# EAGLE board coaster (EAGLE 6.0)
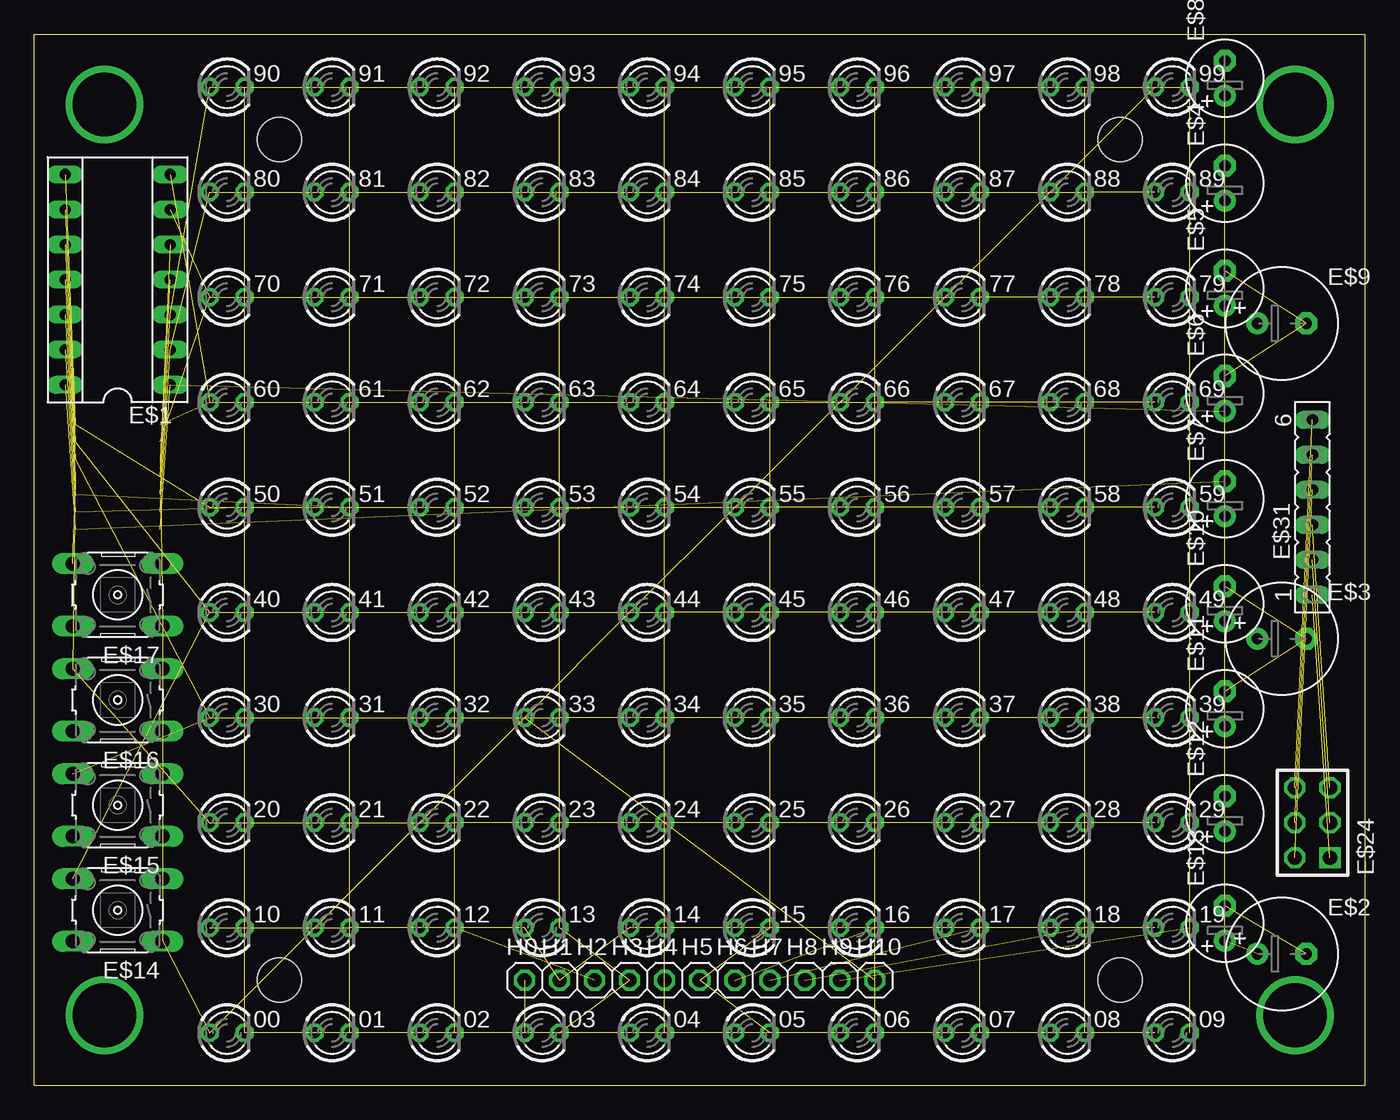
[diagram p0: board, top side]
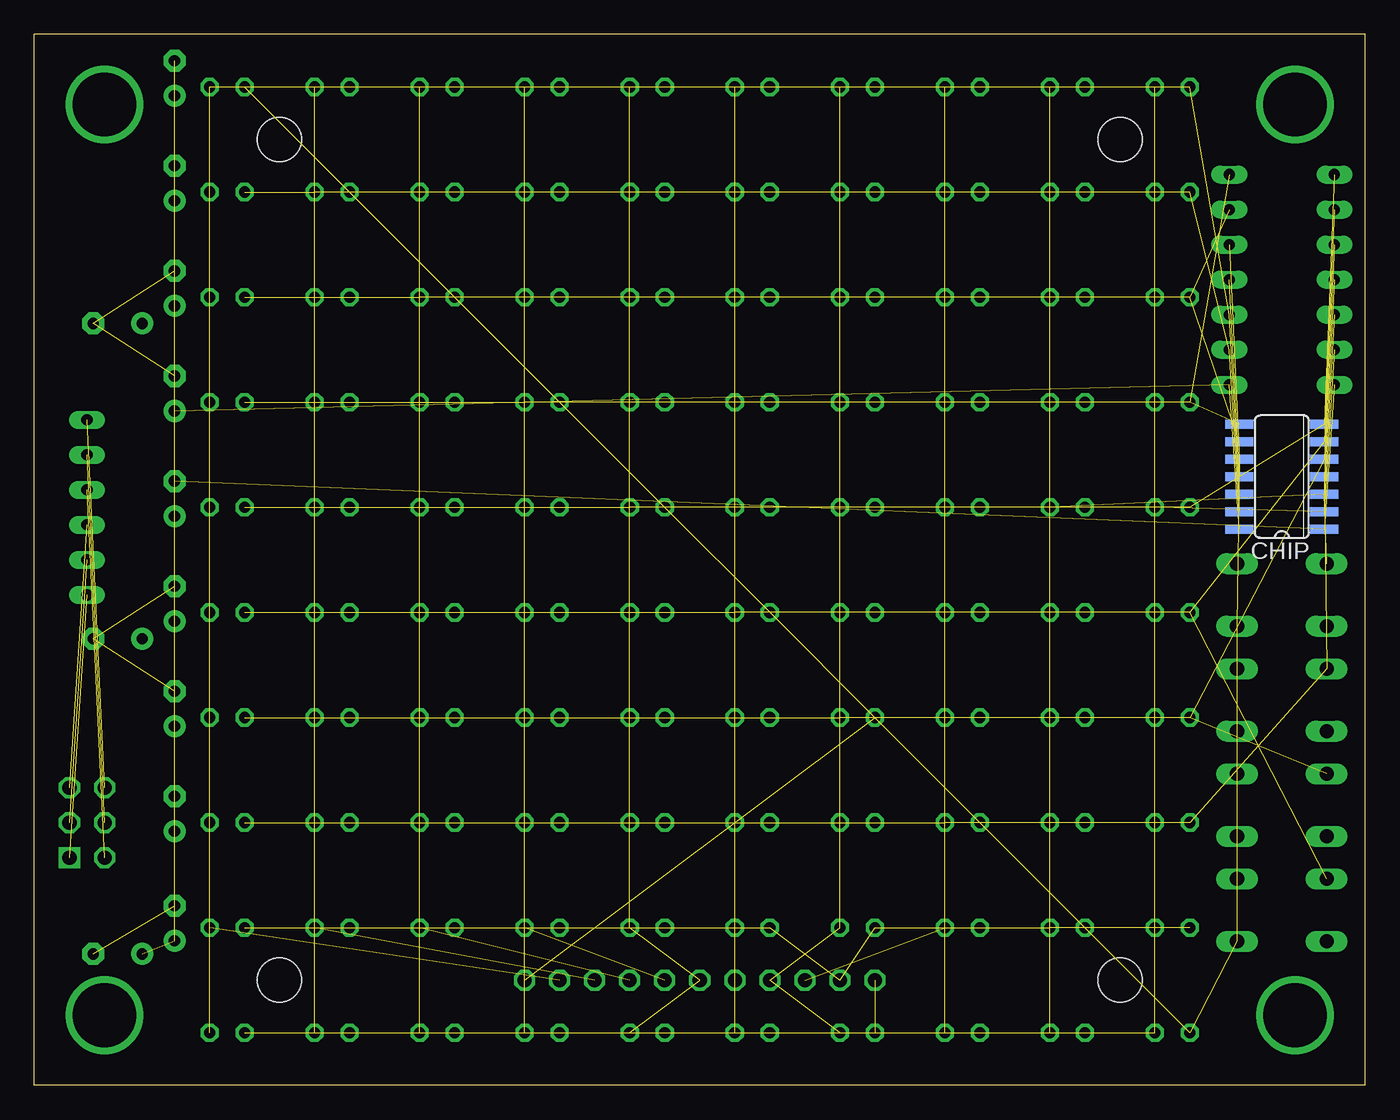
[diagram p1: board, bottom side, seen from below]

Size 96.52 x 76.2 mm. Coordinates in mm from the lower left corner, seen from the top.
Outline: 0,0 0,76.2 96.52,76.2 96.52,0 0,0
Copper layers (1*16): Top 0.035mm / dielectric 1.5mm / Bottom 0.035mm
Design rules: minimum track width 20mil, minimum drill 24mil, track to track 12mil, track to pad 12mil, pad to pad 8mil, via to via 8mil, smd to smd 8mil, copper to edge 40mil, drill to drill 8mil, minimum pad ring 10mil, minimum via ring 8mil, stop-mask expansion 4mil, vias tented up to drill 0mil, thermal gap 10mil
Holes 3.2 mm at 17.78,7.62 17.78,68.58 78.74,7.62 78.74,68.58

## Footprints (pad centres in the part's own frame; a part is rotated, then mirrored left to right if it is on the bottom)
LED3MM = drill 0.813 octagon: A -1.27,0; K 1.27,0
SO14 = smd 0.66 x 2.032: 1 -3.81,-3.073; 2 -2.54,-3.073; 3 -1.27,-3.073; 4 0,-3.073; 5 1.27,-3.073; 6 2.54,-3.073; 7 3.81,-3.073; 8 3.81,3.073; 9 2.54,3.073; 10 1.27,3.073; 11 0,3.073; 12 -1.27,3.073; 13 -2.54,3.073; 14 -3.81,3.073
SOCKET-14 = drill 0.813 long: 1 -7.62,-3.81; 2 -5.08,-3.81; 3 -2.54,-3.81; 4 0,-3.81; 5 2.54,-3.81; 6 5.08,-3.81; 7 7.62,-3.81; 8 7.62,3.81; 9 5.08,3.81; 10 2.54,3.81; 11 0,3.81; 12 -2.54,3.81; 13 -5.08,3.81; 14 -7.62,3.81
E3,5-8 = drill 0.813 pad 1.6: + -1.778,0 | drill 0.813 pad 1.6 octagon: - 1.778,0
E2,5-6 = drill 0.813 pad 1.6: + -1.27,0 | drill 0.813 pad 1.6 octagon: - 1.27,0
B3F-10XX = drill 1.016 long: 1 -3.251,2.261; 2 3.251,2.261; 3 -3.251,-2.261; 4 3.251,-2.261
AVR-ISP-6 = drill 1.016 square: 1 -2.54,-1.27 | drill 1.016 octagon: 2 -2.54,1.27; 3 0,-1.27; 4 0,1.27; 5 2.54,-1.27; 6 2.54,1.27
FE06 = drill 0.813 long: 1 -6.35,0; 2 -3.81,0; 3 -1.27,0; 4 1.27,0; 5 3.81,0; 6 6.35,0
1X01 = drill 1.016 octagon: 1 0,0

## Placement (x,y rotation side)
00  [LED3MM]  13.97,3.81 0 top
01  [LED3MM]  21.59,3.81 0 top
02  [LED3MM]  29.21,3.81 0 top
03  [LED3MM]  36.83,3.81 0 top
04  [LED3MM]  44.45,3.81 0 top
05  [LED3MM]  52.07,3.81 0 top
06  [LED3MM]  59.69,3.81 0 top
07  [LED3MM]  67.31,3.81 0 top
08  [LED3MM]  74.93,3.81 0 top
09  [LED3MM]  82.55,3.81 0 top
10  [LED3MM]  13.97,11.43 0 top
11  [LED3MM]  21.59,11.43 0 top
12  [LED3MM]  29.21,11.43 0 top
13  [LED3MM]  36.83,11.43 0 top
14  [LED3MM]  44.45,11.43 0 top
15  [LED3MM]  52.07,11.43 0 top
16  [LED3MM]  59.69,11.43 0 top
17  [LED3MM]  67.31,11.43 0 top
18  [LED3MM]  74.93,11.43 0 top
19  [LED3MM]  82.55,11.43 0 top
20  [LED3MM]  13.97,19.05 0 top
21  [LED3MM]  21.59,19.05 0 top
22  [LED3MM]  29.21,19.05 0 top
23  [LED3MM]  36.83,19.05 0 top
24  [LED3MM]  44.45,19.05 0 top
25  [LED3MM]  52.07,19.05 0 top
26  [LED3MM]  59.69,19.05 0 top
27  [LED3MM]  67.31,19.05 0 top
28  [LED3MM]  74.93,19.05 0 top
29  [LED3MM]  82.55,19.05 0 top
30  [LED3MM]  13.97,26.67 0 top
31  [LED3MM]  21.59,26.67 0 top
32  [LED3MM]  29.21,26.67 0 top
33  [LED3MM]  36.83,26.67 0 top
34  [LED3MM]  44.45,26.67 0 top
35  [LED3MM]  52.07,26.67 0 top
36  [LED3MM]  59.69,26.67 0 top
37  [LED3MM]  67.31,26.67 0 top
38  [LED3MM]  74.93,26.67 0 top
39  [LED3MM]  82.55,26.67 0 top
40  [LED3MM]  13.97,34.29 0 top
41  [LED3MM]  21.59,34.29 0 top
42  [LED3MM]  29.21,34.29 0 top
43  [LED3MM]  36.83,34.29 0 top
44  [LED3MM]  44.45,34.29 0 top
45  [LED3MM]  52.07,34.29 0 top
46  [LED3MM]  59.69,34.29 0 top
47  [LED3MM]  67.31,34.29 0 top
48  [LED3MM]  74.93,34.29 0 top
49  [LED3MM]  82.55,34.29 0 top
50  [LED3MM]  13.97,41.91 0 top
51  [LED3MM]  21.59,41.91 0 top
52  [LED3MM]  29.21,41.91 0 top
53  [LED3MM]  36.83,41.91 0 top
54  [LED3MM]  44.45,41.91 0 top
55  [LED3MM]  52.07,41.91 0 top
56  [LED3MM]  59.69,41.91 0 top
57  [LED3MM]  67.31,41.91 0 top
58  [LED3MM]  74.93,41.91 0 top
59  [LED3MM]  82.55,41.91 0 top
60  [LED3MM]  13.97,49.53 0 top
61  [LED3MM]  21.59,49.53 0 top
62  [LED3MM]  29.21,49.53 0 top
63  [LED3MM]  36.83,49.53 0 top
64  [LED3MM]  44.45,49.53 0 top
65  [LED3MM]  52.07,49.53 0 top
66  [LED3MM]  59.69,49.53 0 top
67  [LED3MM]  67.31,49.53 0 top
68  [LED3MM]  74.93,49.53 0 top
69  [LED3MM]  82.55,49.53 0 top
70  [LED3MM]  13.97,57.15 0 top
71  [LED3MM]  21.59,57.15 0 top
72  [LED3MM]  29.21,57.15 0 top
73  [LED3MM]  36.83,57.15 0 top
74  [LED3MM]  44.45,57.15 0 top
75  [LED3MM]  52.07,57.15 0 top
76  [LED3MM]  59.69,57.15 0 top
77  [LED3MM]  67.31,57.15 0 top
78  [LED3MM]  74.93,57.15 0 top
79  [LED3MM]  82.55,57.15 0 top
80  [LED3MM]  13.97,64.77 0 top
81  [LED3MM]  21.59,64.77 0 top
82  [LED3MM]  29.21,64.77 0 top
83  [LED3MM]  36.83,64.77 0 top
84  [LED3MM]  44.45,64.77 0 top
85  [LED3MM]  52.07,64.77 0 top
86  [LED3MM]  59.69,64.77 0 top
87  [LED3MM]  67.31,64.77 0 top
88  [LED3MM]  74.93,64.77 0 top
89  [LED3MM]  82.55,64.77 0 top
90  [LED3MM]  13.97,72.39 0 top
91  [LED3MM]  21.59,72.39 0 top
92  [LED3MM]  29.21,72.39 0 top
93  [LED3MM]  36.83,72.39 0 top
94  [LED3MM]  44.45,72.39 0 top
95  [LED3MM]  52.07,72.39 0 top
96  [LED3MM]  59.69,72.39 0 top
97  [LED3MM]  67.31,72.39 0 top
98  [LED3MM]  74.93,72.39 0 top
99  [LED3MM]  82.55,72.39 0 top
CHIP  [SO14]  6.03,44.13 90 bottom
E$1  [SOCKET-14]  6.03,58.42 90 top
E$2  [E3,5-8]  90.49,9.53 0 top
E$3  [E3,5-8]  90.49,32.38 0 top
E$4  [E2,5-6]  86.36,65.41 90 top
E$5  [E2,5-6]  86.36,57.78 90 top
E$6  [E2,5-6]  86.36,50.16 90 top
E$7  [E2,5-6]  86.36,42.55 90 top
E$8  [E2,5-6]  86.36,73.03 90 top
E$9  [E3,5-8]  90.49,55.24 0 top
E$10  [E2,5-6]  86.36,34.92 90 top
E$11  [E2,5-6]  86.36,27.3 90 top
E$12  [E2,5-6]  86.36,19.68 90 top
E$13  [E2,5-6]  86.36,11.75 90 top
E$14  [B3F-10XX]  6.03,12.7 180 top
E$15  [B3F-10XX]  6.03,20.32 180 top
E$16  [B3F-10XX]  6.03,27.94 180 top
E$17  [B3F-10XX]  6.03,35.56 180 top
E$24  [AVR-ISP-6]  92.71,19.05 90 top
E$31  [FE06]  92.71,41.91 90 top
H0  [1X01]  35.56,7.62 0 top
H1  [1X01]  38.1,7.62 0 top
H2  [1X01]  40.64,7.62 0 top
H3  [1X01]  43.18,7.62 0 top
H4  [1X01]  45.72,7.62 0 top
H5  [1X01]  48.26,7.62 0 top
H6  [1X01]  50.8,7.62 0 top
H7  [1X01]  53.34,7.62 0 top
H8  [1X01]  55.88,7.62 0 top
H9  [1X01]  58.42,7.62 0 top
H10  [1X01]  60.96,7.62 0 top

## Library data of the parts
00 01-09 10-99 = led
CHIP = maxim
E$1 = ic-package
E$2-E$13 = rcl
E$14-E$17 = switch-omron
E$24 = avr-5
E$31 = con-lsta
H0 H1-H10 = pinhead

## Nets
D: 00.A 11.A 22.A 33.A 44.A 55.A 66.A 77.A 88.A 99.A CHIP.10 E$1.5 E$14.1 E$15.1 E$16.1 E$17.1 H10.1
S0: 00.K 01.A 02.A 03.A 04.A 05.A 06.A 07.A 08.A 09.A 10.K 20.K 30.K 40.K 50.K 60.K 70.K 80.K 90.K CHIP.2 E$1.13 H0.1
S1: 01.K 10.A 11.K 12.A 13.A 14.A 15.A 16.A 17.A 18.A 19.A 21.K 31.K 41.K 51.K 61.K 71.K 81.K 91.K CHIP.3 E$1.12 E$17.4 H1.1
S2: 02.K 12.K 20.A 21.A 22.K 23.A 24.A 25.A 26.A 27.A 28.A 29.A 32.K 42.K 52.K 62.K 72.K 82.K 92.K CHIP.4 E$1.11 E$16.4 H2.1
S3: 03.K 13.K 23.K 30.A 31.A 32.A 33.K 34.A 35.A 36.A 37.A 38.A 39.A 43.K 53.K 63.K 73.K 83.K 93.K CHIP.5 E$1.10 E$15.4 H3.1
S4: 04.K 14.K 24.K 34.K 40.A 41.A 42.A 43.A 44.K 45.A 46.A 47.A 48.A 49.A 54.K 64.K 74.K 84.K 94.K CHIP.6 E$1.9 E$14.4 H4.1
S5: 05.K 15.K 25.K 35.K 45.K 50.A 51.A 52.A 53.A 54.A 55.K 56.A 57.A 58.A 59.A 65.K 75.K 85.K 95.K CHIP.7 E$1.8 H5.1
S6: 06.K 16.K 26.K 36.K 46.K 56.K 60.A 61.A 62.A 63.A 64.A 65.A 66.K 67.A 68.A 69.A 76.K 86.K 96.K CHIP.8 E$1.7 H6.1
S7: 07.K 17.K 27.K 37.K 47.K 57.K 67.K 70.A 71.A 72.A 73.A 74.A 75.A 76.A 77.K 78.A 79.A 87.K 97.K CHIP.9 E$1.6 H7.1
S8: 08.K 18.K 28.K 38.K 48.K 58.K 68.K 78.K 80.A 81.A 82.A 83.A 84.A 85.A 86.A 87.A 88.K 89.A 98.K CHIP.13 E$1.2 H8.1
S9: 09.K 19.K 29.K 39.K 49.K 59.K 69.K 79.K 89.K 90.A 91.A 92.A 93.A 94.A 95.A 96.A 97.A 98.A 99.K CHIP.12 E$1.3 H9.1
S$1: CHIP.14 E$1.1 E$2.+ E$4.+ E$5.+ E$6.+ E$7.+ E$8.+ E$10.+ E$11.+ E$12.+ E$13.+
S$2: CHIP.1 E$1.14 E$2.- E$3.- E$4.- E$5.- E$6.- E$7.- E$8.- E$9.- E$10.- E$11.- E$12.- E$13.-
S$5: CHIP.11 E$1.4
S$81: E$24.1 E$31.1
S$82: E$24.3 E$31.2
S$85: E$24.5 E$31.3
S$86: E$24.2 E$31.4
S$87: E$24.4 E$31.5
S$88: E$24.6 E$31.6

## Tracks (layer width: path | path; a pad name or v marks a point on that pad's centre or on a via)
D  (16 unrouted)
S0  (21 unrouted)
S1  (22 unrouted)
S2  (22 unrouted)
S3  (22 unrouted)
S4  (22 unrouted)
S5  (21 unrouted)
S6  (21 unrouted)
S7  (21 unrouted)
S8  (21 unrouted)
S9  (21 unrouted)
S$1  (11 unrouted)
S$2  (13 unrouted)
S$3  (via drill 4.63)
  other vias: 91.44,71.12
S$4  (via drill 4.63)
  other vias: 5.08,71.12
S$5  (1 unrouted)
S$81  (1 unrouted)
S$82  (1 unrouted)
S$83  (via drill 4.63)
  other vias: 91.44,5.08
S$84  (via drill 4.63)
  other vias: 5.08,5.08
S$85  (1 unrouted)
S$86  (1 unrouted)
S$87  (1 unrouted)
S$88  (1 unrouted)